# Altium PCB RiscPC_VRAM_16bit.PcbDoc (part 2 of 2)
Units mm, origin at the board's own origin, x right, y up, seen from the top; angles counter-clockwise.
Board outline 102.87 x 28 mm, 6 copper layers (Top_Power, Inner 1, Inner 2, Inner 3, Inner 4, Bottom_Ground), stack 1.211 mm thick; 29 components, 122 nets, 442 pads, 442 vias.
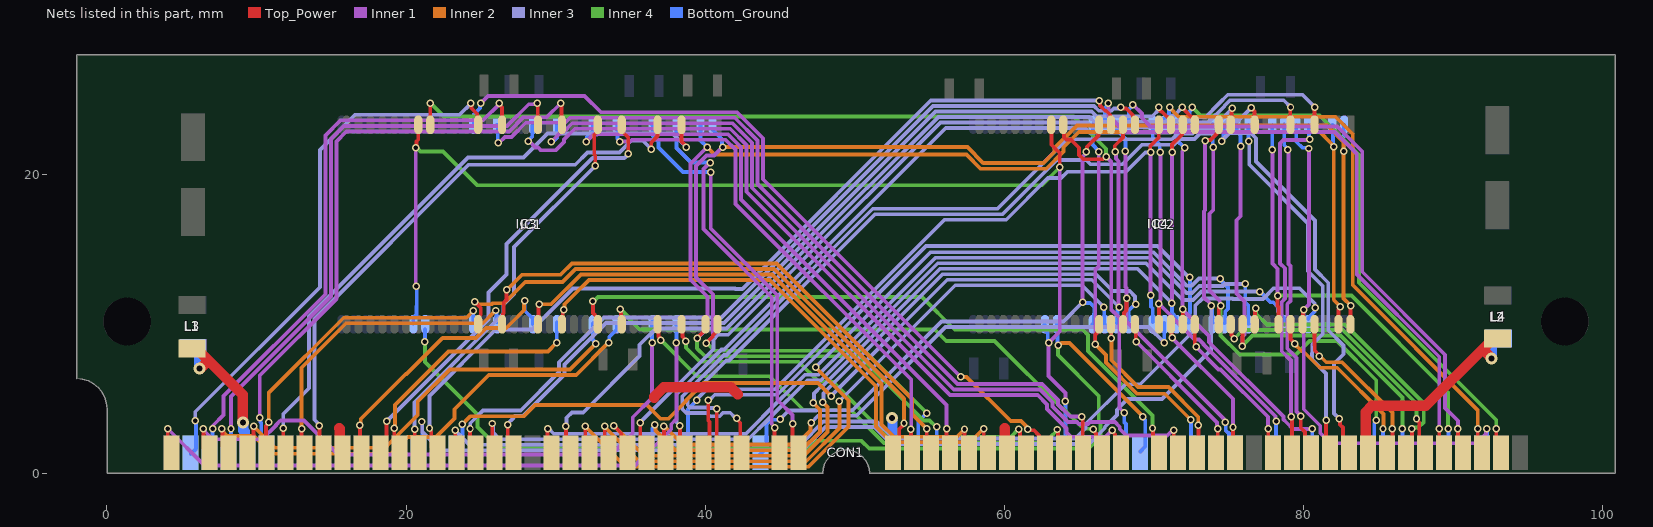
[diagram p6: the nets of this part, all layers, seen from the top]

## Via types
v1: diameter 0.5, hole 0.3, Top_Power to Bottom_Ground, tented both sides, 419 vias
v2: diameter 0.8, hole 0.4, Top_Power to Bottom_Ground, tented both sides, 23 vias

## Nets (pads, with @x,y where several pads share a name; then routed paths per layer and width w, separated by ;. In a path a pad name is that pad's centre, name@x,y a point inside that pad or via, vN(x,y) a via of type N, cw(c..) or ccw(c..) an arc to the next point about the centre after c; other vN are vias at no path point) (continued)
Rd19: CON1.B14 IC2.12 IC4.12 | length 77.3
  Top_Power w0.254: v1(73.423,22.242) 73.47,22.289 73.775,22.289 74.184,22.698 74.184,22.739 74.311,22.866 IC2.12@74.311,23.473
  Inner 1 w0.254: v1(73.423,22.242) 73.423,17.603 73.343,17.522 73.343,11.776 73.838,11.28 v1(73.838,11.218)
  Inner 3 w0.254: v1(21.055,3.477) 21.074,3.457 21.074,2.812 22.337,1.549 46.482,1.549 48.044,3.111 51.308,3.111 52.451,1.968 65.651,1.968 66.708,3.025 66.708,3.1 67.53,3.922 67.53,4.268 68.24,4.978 70.535,4.978 73.838,8.281 v1(73.838,11.218)
  Bottom_Ground w0.254: CON1.B14@20.819,1.406 21.074,1.661 21.074,3.457 v1(21.055,3.477) ; v1(73.838,11.218) 73.876,11.18 73.876,10.121 IC4.12@73.914,10.084
Rd20: CON1.B26 IC2.15 IC4.15 | length 59.4
  Top_Power w0.254: v1(71.216,21.492) 71.216,21.991 71.876,22.65 71.876,23.349 IC2.15@71.923,23.397
  Inner 1 w0.254: v1(71.202,11.379) 71.209,11.386 71.209,21.485 v1(71.216,21.492)
  Inner 2 w0.254: v1(36.63,3.254) 36.678,3.207 36.678,2.866 37.982,1.562 46.444,1.562 47.667,2.785 47.667,4.267 v1@47.219,4.715
  Inner 3 w0.254: v1(47.219,4.716) 47.265,4.763 47.265,5.347 47.789,5.872 47.883,5.872 55.702,13.691 68.891,13.691 v1(71.202,11.379)
  Bottom_Ground w0.254: CON1.B26@36.06,1.395 36.473,1.808 36.473,3.03 36.63,3.188 v1(36.63,3.254) ; v1(71.202,11.379) 71.202,10.725 71.476,10.452 IC4.15@71.476,10.109
Rd21: CON1.B28 IC2.17 IC4.17 | length 54.7
  Top_Power w0.254: v1(69.774,21.488) 69.748,21.514 69.748,21.898 70.323,22.473 IC2.17@70.323,23.346
  Inner 1 w0.254: v1(69.774,11.913) v1(69.774,21.488)
  Inner 3 w0.254: v1(39.441,4.905) 39.441,4.971 40.108,5.639 44.666,5.639 55.994,16.967 60.122,16.967 62.903,19.748 63.792,19.748 64.222,20.178 68.137,20.178 69.419,21.459 69.745,21.459 v1(69.774,21.488)
  Bottom_Ground w0.254: CON1.B28@38.573,1.355 38.838,1.62 38.838,4.187 38.84,4.189 38.84,4.294 39.441,4.895 v1(39.441,4.905) ; v1(69.774,11.913) 69.804,11.882 69.804,11.155 69.915,11.044 IC4.17@69.915,10.123
Rd22: CON1.B16 IC2.20 IC4.20 | length 66
  Top_Power w0.254: v1(67.408,21.505) 67.382,21.532 67.382,21.916 67.932,22.466 IC2.20@67.932,23.317
  Inner 1 w0.254: v1(67.408,21.505) 67.455,21.458 67.455,21.057 67.635,20.877 67.635,11.164 v1(67.682,11.117)
  Inner 2 w0.254: v1(23.743,3.309) 23.809,3.309 23.992,3.491 ; 23.982,3.501 24.317,3.835 27.889,3.835 28.626,4.572 36.096,4.572 37.011,3.658 37.55,3.658 38.718,4.826 38.718,4.877 39.887,6.045 47.549,6.045 v1(48.412,5.182)
  Inner 3 w0.254: v1(48.412,5.182) 56.185,12.954 65.846,12.954 v1(67.682,11.117)
  Bottom_Ground w0.254: CON1.B16@23.384,1.406 23.773,1.795 23.773,2.698 23.773,3.278 v1(23.743,3.309) ; IC4.20@67.513,10.058 67.572,10.117 67.572,10.94 67.682,11.051 v1(67.682,11.117)
Rd23: CON1.B32 IC2.22 IC4.22 | length 41.3
  Top_Power w0.254: v1(65.483,21.505) 65.53,21.552 65.53,21.842 66.284,22.596 66.284,23.396 IC2.22@66.335,23.447
  Inner 1 w0.254: v1(65.227,11.455) 65.227,21.183 65.483,21.439 v1(65.483,21.505)
  Inner 3 w0.254: v1(45.009,3.632) 45.584,4.208 47.422,4.208 47.444,4.229 49.847,4.229 55.791,10.173 63.944,10.173 v1(65.227,11.455)
  Bottom_Ground w0.254: CON1.B32@43.704,1.304 44.093,1.693 44.093,3.305 44.378,3.59 44.967,3.59 v1(45.009,3.632) ; v1(65.227,11.455) 65.273,11.409 65.742,11.409 66.03,11.121 66.03,10.714 65.972,10.656 65.972,10.066 IC4.22@65.888,9.982
Rd24: CON1.B51 IC2.43 IC4.43 | length 27.5
  Top_Power w0.254: v1(66.083,8.628) 66.083,9.297 66.332,9.547 IC2.43@66.332,9.977
  Inner 1 w0.254: v1(66.083,8.628) 66.083,13.631 66.303,13.851 v1(66.303,21.505)
  Inner 2 w0.254: v1(66.083,8.628) 66.787,7.923 66.787,7.419 68.872,5.334 70.726,5.334 v1(72.465,3.595)
  Bottom_Ground w0.254: IC4.43@65.915,23.333 65.915,21.96 66.303,21.572 v1(66.303,21.505) ; v1(72.465,3.595) 72.479,3.581 72.479,1.841 CON1.B51@72.889,1.431
Rd25: CON1.B53 IC2.45 IC4.45 | length 27.2
  Top_Power w0.254: IC2.45@67.896,9.998 67.989,10.091 67.989,10.729 68.174,10.914 v1(68.174,11.709)
  Inner 1 w0.254: v1(68.067,21.543) 68.104,21.505 68.104,12.467 68.174,12.398 v1(68.174,11.709) 68.174,10.153 74.651,3.675 74.651,3.629 74.774,3.506 v1(74.774,3.44)
  Bottom_Ground w0.254: IC4.45@67.513,23.335 67.513,22.974 68.104,22.383 68.104,21.581 v1(68.067,21.543) ; v1(74.774,3.44) 74.794,3.42 74.794,2.895 75.019,2.671 75.019,1.714 CON1.B53@75.429,1.304
Rd26: CON1.B55 IC2.48 IC4.48 | length 27.1
  Top_Power w0.254: IC2.48@70.332,9.977 v1(70.333,11.354)
  Inner 1 w0.254: v1(70.434,21.488) 70.434,11.626 70.38,11.571 70.38,11.401 v1(70.333,11.354) 72.72,8.966 73.016,8.966 73.317,8.665 73.317,8.627 78.12,3.824 78.12,3.542 v1(78.167,3.495)
  Bottom_Ground w0.254: IC4.48@69.921,23.278 69.921,22.481 70.387,22.014 70.387,21.535 v1(70.434,21.488) ; CON1.B55@77.918,1.33 78.167,1.578 v1(78.167,3.495)
Rd27: CON1.B57 IC2.50 IC4.50 | length 27.7
  Top_Power w0.254: v1(71.914,10.976) 71.923,10.967 71.923,9.991 IC2.50@71.935,9.98
  Inner 1 w0.254: v1(72.06,21.768) 72.06,21.701 71.894,21.536 71.894,12.904 71.914,12.885 v1(71.914,10.976) 73.685,9.204 73.685,8.779 78.658,3.807 78.658,3.613 78.876,3.395 78.878,3.395 79.291,2.982 80.572,2.982 v1(80.58,2.99)
  Bottom_Ground w0.254: IC4.50@71.515,23.321 71.515,22.307 72.054,21.768 v1(72.06,21.768) ; CON1.B57@80.458,1.38 80.58,1.502 v1(80.58,2.99)
Rd28: CON1.B60 IC2.53 IC4.53 | length 33.3
  Top_Power w0.254: IC2.53@74.332,9.977 74.332,11.032 74.452,11.152 v1(74.452,11.218)
  Inner 1 w0.254: v1(73.961,21.827) 73.961,17.62 73.711,17.37 73.711,12.229 74.405,11.535 74.405,11.265 v1(74.452,11.218)
  Inner 4 w0.254: v1(74.452,11.218) 74.452,9.236 75.734,7.954 79.506,7.954 80.404,8.852 82.246,8.852 84.861,6.236 v1(84.861,3.556)
  Bottom_Ground w0.254: IC4.53@73.914,23.335 73.938,23.311 73.938,21.85 v1(73.961,21.827) ; CON1.B60@84.319,1.406 84.725,1.812 84.725,3.353 84.861,3.489 v1(84.861,3.556)
Rd29: CON1.B62 IC2.55 IC4.55 | length 33.3
  Top_Power w0.254: v1(75.895,8.517) 75.914,8.536 75.914,9.959 IC2.55@75.932,9.977
  Inner 1 w0.254: v1(75.793,21.879) 75.793,21.171 75.793,17.203 75.527,16.937 75.527,12.027 76.048,11.506 76.048,9.275 75.921,9.148 75.921,8.543 v1(75.895,8.517)
  Inner 4 w0.254: v1(75.895,8.517) 76.598,9.22 82.473,9.22 86.614,5.08 v1@86.614,2.997
  Bottom_Ground w0.254: IC4.55@75.514,23.335 75.514,22.893 75.793,22.614 v1(75.793,21.879) ; v1@86.614,2.997 86.614,1.727 CON1.B62@86.884,1.457
  other v1: 86.614,3
Rd30: CON1.B64 IC2.58 IC4.58 | length 31.7
  Top_Power w0.254: v1(78.266,11.895) 78.266,11.203 78.332,11.137 IC2.58@78.332,9.977
  Inner 1 w0.254: v1(77.91,21.632) 77.919,21.624 77.919,14.04 78.266,13.693 v1(78.266,11.895)
  Inner 4 w0.254: v1(78.266,11.895) 83.203,11.895 89.664,5.434 89.664,3.025 v1@89.692,2.997
  Bottom_Ground w0.254: v1(77.91,21.632) 77.913,21.635 77.913,23.319 IC4.58@77.915,23.322 ; CON1.B64@89.399,1.431 89.692,1.724 v1@89.692,2.997
  other v1: 89.692,3
Rd31: CON1.B66 IC2.60 IC4.60 | length 36.5
  Top_Power w0.254: IC2.60@79.932,9.977 79.974,10.019 79.974,10.907 v1(80.015,10.948)
  Inner 1 w0.254: v1(80.365,21.73) 80.365,11.298 v1(80.015,10.948) 80.015,4.302 81.119,3.198 81.119,2.701 81.794,2.026 91.586,2.026 92.21,2.65 92.21,2.956 v1(92.257,3.003)
  Bottom_Ground w0.254: IC4.60@79.515,23.322 79.515,22.187 79.925,21.777 80.318,21.777 v1(80.365,21.73) ; CON1.B66@91.939,1.406 92.257,1.724 v1(92.257,3.003)
Sc: CON1.B36 IC1.64 IC2.64 IC3.64 IC4.64 | length 95.3
  Top_Power w0.254: v1(40.056,8.712) 40.502,9.158 40.502,9.231 40.818,9.547 IC1.64@40.818,9.977 ; IC2.64@83.132,9.977 83.146,9.991 83.146,11.188 v1(83.16,11.201)
  Inner 1 w0.254: v1(40.056,8.712) 40.513,9.169 40.513,11.989 39.387,13.115 39.387,20.556 40.09,21.26 40.598,21.26 v1(41.16,21.823)
  Inner 4 w0.254: v1(40.056,8.712) 40.122,8.712 40.63,8.204 50.648,8.204 v1(54.813,4.039)
  Inner 2 w0.254: v1(41.16,21.823) 57.527,21.823 58.581,20.768 62.611,20.768 63.339,21.496 63.339,21.759 64.846,23.266 81.585,23.266 82.677,22.174 v1(82.677,21.539) 82.677,11.705 83.16,11.223 v1(83.16,11.201)
  Bottom_Ground w0.254: IC3.64@40.481,22.979 41.113,22.346 41.113,21.87 v1(41.16,21.823) ; CON1.B36@53.839,1.431 54.245,1.837 54.245,3.47 v1(54.813,4.039) ; v1(82.677,21.539) 82.696,21.558 82.696,23.303 IC4.64@82.715,23.322
Se*: CON1.B37 IC1.63 IC2.63 IC3.63 IC4.63 | length 95.3
  Top_Power w0.254: v1(39.459,9.035) 39.459,9.052 40.018,9.61 IC1.63@40.018,9.977 ; IC2.63@82.332,9.977 82.348,9.993 82.348,10.983 82.444,11.08 v1(82.444,11.146)
  Inner 1 w0.254: v1(39.459,9.035) 40.145,9.721 40.145,11.824 39.018,12.95 39.018,20.709 v1(40.132,21.823)
  Inner 4 w0.254: v1(39.459,9.035) 39.459,8.369 39.992,7.836 50.321,7.836 54.61,3.547 55.004,3.547 55.427,3.124 v1(55.474,3.124)
  Inner 2 w0.254: v1(40.132,21.823) 40.623,21.331 57.459,21.331 58.41,20.381 62.799,20.381 63.957,21.539 63.957,21.819 64.973,22.835 81.093,22.835 81.825,22.102 81.825,22.093 82.017,21.902 82.017,11.611 82.444,11.184 v1(82.444,11.146)
  Bottom_Ground w0.254: IC3.63@39.681,23.329 39.681,22.273 v1(40.132,21.823) ; CON1.B37@55.033,1.431 55.474,1.872 v1(55.474,3.124) ; IC4.63@81.915,23.322 81.97,23.268 81.97,21.882 v1(82.017,21.835)
Ud0: CON1.A1 IC3.4 | length 44.6
  Top_Power w0.254: v1@4.068,2.997 4.068,1.683 CON1.A1@4.409,1.342
  Inner 1 w0.254: v1@4.068,2.997 6.532,0.533 35.306,0.533 37.73,2.957 37.73,3.296 38.075,3.641 v1(38.075,8.75)
  Bottom_Ground w0.254: v1@38.075,8.839 IC3.4@38.075,10.008
  other v1: 4.068,3
Ud1: CON1.A3 IC3.6 | length 40.8
  Top_Power w0.254: v1@6.451,2.997 6.451,1.662 CON1.A3@6.847,1.266
  Inner 1 w0.254: v1@6.451,2.997 6.451,2.931 6.574,2.808 6.574,2.794 7.082,2.286 10.363,2.286 11.293,3.216 11.293,3.235 11.581,3.523 11.6,3.523 11.616,3.539 13.168,3.539 15.437,1.27 33.731,1.27 35.157,2.695 35.157,3.762 36.449,5.055 v1(36.449,8.75)
  Bottom_Ground w0.254: v1@36.449,8.966 IC3.6@36.449,10.135
  other v1: 6.451,3
Ud2: CON1.A4 IC3.9 | length 33.4
  Top_Power w0.254: v1@7.68,2.997 7.717,2.96 7.717,1.793 CON1.A4@8.168,1.342
  Inner 2 w0.254: v1@7.68,2.997 7.68,2.933 7.803,2.81 7.803,2.755 8.043,2.515 9.83,2.515 11.024,1.321 18.999,1.321 20.117,2.438 21.996,2.438 23.241,3.683 23.241,4.293 25.532,6.583 31.374,6.583 v1(33.539,8.749)
  Bottom_Ground w0.254: v1(33.539,8.749) 33.586,8.796 33.586,9.127 34.087,9.627 IC3.9@34.087,10.033
  other v1: 7.68,3
Ud3: CON1.A5 IC3.11 | length 30.8
  Top_Power w0.254: CON1.A5@9.412,1.342 8.987,1.768 9.16,1.768 9.803,2.411 9.803,3.148 v1(9.83,3.175)
  Inner 2 w0.254: v1(9.83,3.175) 9.83,3.124 11.227,1.727 18.593,1.727 20.782,3.917 20.782,4.806 22.937,6.96 30.96,6.96 v1(32.669,8.669)
  Bottom_Ground w0.254: IC3.11@32.487,10.033 32.487,8.918 32.669,8.736 v1(32.669,8.669)
Ud4: CON1.A13 IC3.14 | length 17.1
  Top_Power w0.254: v1(19.212,3.041) 19.212,1.753 CON1.A13@19.572,1.393
  Inner 2 w0.254: v1(19.212,3.041) 19.255,3.084 19.255,4.574 22.843,8.162 29.486,8.162 v1(30.074,8.75)
  Bottom_Ground w0.254: v1@30.074,8.941 IC3.14@30.074,10.109
Ud5: CON1.A11 IC3.16 | length 18.8
  Top_Power w0.254: v1(16.916,3.226) 16.916,1.484 CON1.A11@17.058,1.342
  Inner 2 w0.254: v1(16.916,3.226) 16.963,3.273 16.963,3.637 19.982,6.656 20.034,6.656 22.446,9.068 24.676,9.068 25.333,9.724 26.691,9.724 27.886,10.919 27.886,11.496 v1(27.933,11.543)
  Bottom_Ground w0.254: v1(27.933,11.543) 27.933,10.887 28.407,10.412 28.487,10.412 IC3.16@28.487,9.982
Ud6: CON1.A8 IC3.19 | length 21.2
  Top_Power w0.254: v1(13.012,3.001) 13.012,1.527 CON1.A8@13.222,1.317
  Inner 2 w0.254: v1(13.012,3.001) 13.012,7.068 15.986,10.042 25.13,10.042 25.986,10.899 v1(26.01,10.899)
  Bottom_Ground w0.254: v1(26.01,10.899) 26.048,10.86 26.048,10.172 IC3.19@26.086,10.135
Ud7: CON1.A6 IC3.21 | length 20.8
  Top_Power w0.254: CON1.A6@10.624,1.405 10.624,3.186 10.809,3.37 v1(10.809,3.437)
  Inner 2 w0.254: v1(10.809,3.437) 10.812,3.439 10.812,5.389 15.837,10.414 24.03,10.414 v1(24.495,10.879)
  Bottom_Ground w0.254: IC3.21@24.486,10.084 24.491,10.089 24.491,10.875 v1(24.495,10.879)
Ud8: CON1.A43 IC3.44 | length 51.6
  Top_Power w0.254: v1(61.566,2.944) 61.613,2.897 61.974,2.897 62.319,2.552 62.319,1.75 CON1.A43@62.702,1.368
  Inner 1 w0.254: v1@24.998,24.769 25.476,25.247 31.934,25.247 33.025,24.155 41.834,24.155 42.127,24.155 43.862,22.42 43.862,22.127 43.862,19.672 v1@57.082,6.452
  Inner 2 w0.254: v1(57.099,6.469) 57.11,6.459 57.473,6.459 60.427,3.505 61.114,3.505 61.444,3.175 61.444,3.133 61.566,3.01 v1(61.566,2.944)
  Bottom_Ground w0.254: IC3.44@24.487,23.322 24.544,23.379 24.544,24.011 24.951,24.418 24.951,24.722 v1@24.998,24.769
  other v1: 24.998,24.75
Ud9: CON1.A45 IC3.46 | length 53.5
  Top_Power w0.254: v1(65.176,3.81) 65.223,3.763 65.223,3.659 65.236,3.647 65.236,1.424 CON1.A45@65.242,1.418
  Inner 1 w0.254: v1(26.163,22.123) 26.23,22.123 26.609,22.502 27.049,22.502 28.004,23.457 30.632,23.457 30.962,23.787 41.643,23.787 41.974,23.787 43.493,22.268 43.493,21.937 43.493,19.346 56.862,5.978 62.535,5.978 63.593,4.92 63.593,4.622 64.405,3.81 v1(65.176,3.81)
  Bottom_Ground w0.254: IC3.46@26.087,23.322 26.125,23.284 26.125,22.161 v1(26.163,22.123)
Ud10: CON1.A47 IC3.49 | length 53.8
  Top_Power w0.254: v1(67.199,2.896) 67.199,2.829 67.399,2.629 67.399,1.801 CON1.A47@67.807,1.393
  Inner 1 w0.254: v1(28.179,22.214) 28.242,22.214 28.657,21.8 28.836,21.8 29.03,21.607 29.998,21.607 30.549,22.158 30.549,22.326 31.274,23.05 41.669,23.05 42.757,21.963 42.757,18.838 56.354,5.241 62.23,5.241 62.856,4.615 62.856,4.317 64.16,3.013 64.16,2.743 64.449,2.454 66.757,2.454 v1(67.199,2.896)
  Bottom_Ground w0.254: v1(28.179,22.214) 28.179,22.281 28.431,22.533 28.431,23.266 IC3.49@28.487,23.322
Ud11: CON1.A50 IC3.51 | length 56.1
  Top_Power w0.254: v1(71.327,2.906) 71.327,1.658 CON1.A50@71.642,1.342
  Inner 1 w0.254: v1(29.71,22.182) 30.352,22.824 30.52,22.824 31.115,23.419 41.466,23.419 41.822,23.419 43.125,22.115 43.125,21.759 43.125,19.105 56.621,5.609 62.383,5.609 63.225,4.768 63.225,4.47 64.256,3.438 64.855,3.438 64.975,3.319 65.612,3.319 65.73,3.437 67.395,3.437 67.711,3.121 67.711,2.973 68.145,2.539 70.894,2.539 71.26,2.906 v1(71.327,2.906)
  Bottom_Ground w0.254: v1(29.71,22.182) 29.758,22.229 29.872,22.229 30.087,22.444 IC3.51@30.087,23.322
Ud12: CON1.A38 IC3.54 | length 38.5
  Top_Power w0.254: v1@56.134,2.972 56.134,1.636 CON1.A38@56.453,1.317
  Inner 1 w0.254: v1(32.053,22.188) 32.538,22.673 32.781,22.673 32.79,22.682 41.516,22.682 42.389,21.81 42.389,18.317 56.134,4.572 v1(56.134,3)
  Bottom_Ground w0.254: v1(32.053,22.188) 32.1,22.235 32.1,22.505 32.487,22.892 IC3.54@32.487,23.322
Ud13: CON1.A36 IC3.56 | length 34.5
  Top_Power w0.254: v1(53.75,2.946) 53.75,1.429 CON1.A36@53.837,1.342
  Inner 1 w0.254: v1(34.296,22.188) 34.968,22.188 35.094,22.314 41.364,22.314 42.02,21.658 42.02,18.025 53.78,6.265 53.78,2.977 v1(53.75,2.946)
  Bottom_Ground w0.254: IC3.56@34.087,23.322 34.144,23.266 34.144,22.406 34.296,22.255 v1(34.296,22.188)
Ud14: CON1.A34 IC3.59 | length 27.1
  Top_Power w0.254: v1(45.836,3.313) 45.836,1.774 CON1.A34@46.242,1.368
  Inner 1 w0.254: v1(40.369,20.155) 40.369,16.387 44.818,11.938 44.818,4.929 45.836,3.912 v1(45.836,3.313)
  Bottom_Ground w0.254: IC3.59@36.481,23.303 36.508,23.276 36.508,22.573 36.881,22.199 36.881,21.804 38.522,20.164 40.361,20.164 v1(40.369,20.155)
Ud15: CON1.A33 IC3.61 | length 25.7
  Top_Power w0.254: v1(44.635,3.066) 44.635,1.629 CON1.A33@44.972,1.291
  Inner 1 w0.254: v1(40.331,20.769) 40.288,20.769 39.878,20.359 39.878,16.358 44.45,11.786 44.45,3.317 44.635,3.132 v1(44.635,3.066)
  Bottom_Ground w0.254: IC3.61@38.075,22.985 38.075,21.768 39.04,20.803 40.297,20.803 v1(40.331,20.769)
Ud16: CON1.A16 IC4.4 | length 67.6
  Top_Power w0.254: v1(23.282,2.902) 23.282,1.493 CON1.A16@23.459,1.317
  Inner 3 w0.254: v1(23.282,2.902) 23.282,2.876 24.24,1.918 46.329,1.918 47.892,3.48 51.46,3.48 52.603,2.337 64.736,2.337 65.442,3.043 65.442,3.323 68.088,5.969 69.088,5.969 72.762,9.643 72.762,11.227 73.245,11.709 75.251,11.709 75.286,11.675 77.293,11.675 77.66,12.043 77.66,12.052 77.994,12.386 79.732,12.386 80.752,11.367 80.752,11.114 v1(80.799,11.067)
  Bottom_Ground w0.254: IC4.4@80.315,10.332 80.315,10.386 80.752,10.823 80.752,11.02 v1(80.799,11.067)
Ud17: CON1.A18 IC4.6 | length 63.2
  Top_Power w0.254: v1(25.756,3.344) 25.756,1.611 CON1.A18@25.999,1.368
  Inner 3 w0.254: v1(25.756,3.344) 25.803,3.297 25.803,2.75 26.266,2.286 42.881,2.286 44.24,3.646 44.24,3.651 46.829,6.24 47.731,6.24 55.55,14.059 69.478,14.059 71.929,11.608 72.622,11.608 73.185,12.171 77.085,12.171 v1(77.089,12.167)
  Bottom_Ground w0.254: v1(77.089,12.167) 77.8,11.455 77.978,11.455 78.299,11.134 78.299,10.828 78.715,10.412 IC4.6@78.715,10.033
Ud18: CON1.A21 IC4.9 | length 57.4
  Top_Power w0.254: v1@29.464,2.921 29.464,1.585 CON1.A21@29.783,1.266
  Inner 3 w0.254: v1(29.464,3) 29.531,3 29.876,2.654 42.728,2.654 43.872,3.798 43.872,3.803 46.677,6.608 47.578,6.608 55.397,14.427 69.812,14.427 72.174,12.065 72.558,12.065 73.032,12.539 74.626,12.539 74.761,12.675 v1(76.098,12.675)
  Bottom_Ground w0.254: v1(76.098,12.675) 76.098,11.967 76.098,11.45 76.301,11.248 76.301,10.034 IC4.9@76.327,10.008
Ud19: CON1.A23 IC4.11 | length 61.3
  Top_Power w0.254: v1(31.979,3.146) 31.979,1.611 CON1.A23@32.298,1.291
  Inner 2 w0.254: v1(31.979,3.146) 34.667,0.457 46.902,0.457 49.574,3.13 49.574,4.899 v1(47.375,7.099)
  Inner 3 w0.254: v1(47.375,7.099) 55.071,14.795 69.964,14.795 72.212,12.548 72.52,12.548 73.003,13.03 v1(74.422,13.03)
  Bottom_Ground w0.254: v1(74.422,13.03) 74.422,12.964 74.943,12.442 74.943,11.015 74.772,10.843 74.772,10.101 IC4.11@74.715,10.045
Ud20: CON1.A29 IC4.14 | length 44.1
  Top_Power w0.254: CON1.A29@39.875,1.393 40.283,1.801 40.283,3.453 40.208,3.528 v1(40.208,4.905)
  Inner 3 w0.254: v1(40.208,4.905) 40.275,4.905 40.641,5.271 44.818,5.271 54.763,15.215 70.24,15.215 72.347,13.108 v1(72.386,13.108)
  Bottom_Ground w0.254: IC4.14@72.314,10.084 72.372,10.142 72.372,10.739 72.405,10.773 72.405,13.088 v1(72.386,13.108)
Ud21: CON1.A27 IC4.16 | length 41
  Top_Power w0.254: v1(37.238,3.166) 37.238,1.431 CON1.A27@37.321,1.348
  Inner 2 w0.254: v1(37.238,3.166) 37.261,3.166 38.497,1.93 46.101,1.93 47.04,2.869 47.04,3.352 v1(47.087,3.399)
  Inner 3 w0.254: v1(47.087,3.399) 47.549,3.861 50.114,3.861 56.058,9.804 69.634,9.804 v1(70.688,8.75)
  Bottom_Ground w0.254: v1@70.688,8.915 IC4.16@70.688,10.084
Ud22: CON1.A25 IC4.19 | length 47.4
  Top_Power w0.254: v1(33.898,3.186) 34.387,2.697 34.387,1.742 CON1.A25@34.812,1.317
  Inner 2 w0.254: v1(33.898,3.186) 35.89,1.194 46.596,1.194 48.184,2.781 48.184,4.445 v1(47.854,4.775)
  Inner 3 w0.254: v1(47.854,4.775) 47.901,4.822 47.901,5.365 55.858,13.322 66.129,13.322 67.251,12.201 68.377,12.201 68.736,11.842 68.736,11.35 v1(68.783,11.303)
  Bottom_Ground w0.254: IC4.19@68.315,10.174 68.315,10.899 68.719,11.303 v1(68.783,11.303)
Ud23: CON1.A24 IC4.21 | length 44
  Top_Power w0.254: v1(33.285,3.146) 33.285,1.574 CON1.A24@33.517,1.342
  Inner 2 w0.254: v1(33.285,3.146) 33.285,3.104 35.564,0.826 46.749,0.826 48.971,3.047 48.971,4.808 v1(48.96,4.819)
  Inner 3 w0.254: v1(48.96,4.819) 48.96,4.828 56.718,12.586 65.19,12.586 v1(66.649,11.127)
  Bottom_Ground w0.254: v1(66.649,11.127) 66.682,11.094 66.682,10.015 IC4.21@66.715,9.982
Ud24: CON1.A64 IC4.44 | length 42.4
  Top_Power w0.254: v1(89.078,3) 89.078,1.687 CON1.A64@89.397,1.368
  Inner 1 w0.254: v1(66.952,24.748) 66.952,23.929 68.057,22.824 77.54,22.824 77.55,22.834 82.106,22.834 83.553,21.387 83.553,13.335 89.078,7.81 v1(89.078,3)
  Bottom_Ground w0.254: IC4.44@66.723,23.332 66.723,24.453 66.952,24.682 v1(66.952,24.748)
Ud25: CON1.A65 IC4.46 | length 41.1
  Top_Power w0.254: v1(90.322,3) 90.322,1.712 CON1.A65@90.642,1.393
  Inner 1 w0.254: v1(68.598,24.654) 69.192,24.061 69.192,23.781 69.781,23.192 77.387,23.192 77.397,23.202 82.259,23.202 83.922,21.539 83.922,13.487 89.469,7.94 89.469,4.384 90.322,3.531 v1(90.322,3)
  Bottom_Ground w0.254: IC4.46@68.315,23.346 68.315,24.328 68.598,24.611 v1(68.598,24.654)
Ud26: CON1.A66 IC4.49 | length 39.1
  Top_Power w0.254: v1(91.643,3.003) 91.643,1.687 CON1.A66@91.937,1.393
  Inner 2 w0.254: v1@71.044,24.46 71.651,23.853 82.129,23.853 83.287,22.695 83.287,12.598 91.643,4.242 v1(91.643,3.003)
  Bottom_Ground w0.254: IC4.49@70.714,23.334 70.714,23.752 70.997,24.034 70.997,24.413 v1@71.044,24.46
  other v1: 71.044,24.5
Ud27: CON1.A67 IC4.51 | length 37.6
  Top_Power w0.254: v1(92.888,3.003) 92.888,1.712 CON1.A67@93.207,1.393
  Inner 4 w0.254: v1@72.568,24.469 73.108,23.929 77.082,23.929 77.092,23.939 81.09,23.939 83.718,21.311 83.718,12.751 92.888,3.581 v1(92.888,3.003)
  Bottom_Ground w0.254: IC4.51@72.271,23.278 72.372,23.378 72.372,24.205 72.568,24.402 v1@72.568,24.469
  other v1: 72.568,24.5
Ud28: CON1.A59 IC4.54 | length 28
  Top_Power w0.254: v1(82.398,3.658) 82.445,3.611 82.445,3.265 82.639,3.071 82.639,1.928 CON1.A59@83.149,1.418
  Inner 3 w0.254: v1(74.546,22.225) 74.546,22.257 75.048,22.758 76.479,22.758 76.818,22.42 76.818,20.87 80.772,16.916 80.772,13.64 81.658,12.754 81.658,9.579 82.677,8.56 82.677,7.976 82.042,7.341 82.042,4.013 v1(82.398,3.658)
  Bottom_Ground w0.254: v1(74.546,22.225) 74.546,22.292 74.658,22.404 74.658,23.278 IC4.54@74.708,23.328
Ud29: CON1.A58 IC4.56 | length 24.8
  Top_Power w0.254: v1(81.509,3.556) 81.509,1.661 CON1.A58@81.777,1.393
  Inner 3 w0.254: v1(76.327,22.2) 76.367,22.16 76.367,20.661 80.307,16.721 80.307,13.52 81.29,12.538 81.29,9.332 80.586,8.628 80.586,8.065 80.564,8.044 80.564,7.636 81.509,6.692 v1(81.509,3.556)
  Bottom_Ground w0.254: IC4.56@76.315,23.322 76.321,23.315 76.321,22.206 v1(76.327,22.2)
Ud30: CON1.A57 IC4.59 | length 22.9
  Top_Power w0.254: v1(79.81,3.813) 79.82,3.803 79.82,3.055 80.099,2.776 80.099,1.826 CON1.A57@80.532,1.393
  Inner 1 w0.254: v1(78.96,21.641) 78.994,21.607 78.994,14.007 79.126,13.876 79.126,11.539 78.91,11.323 78.91,8.368 79.534,7.744 79.534,4.155 79.81,3.879 v1(79.81,3.813)
  Bottom_Ground w0.254: IC4.59@78.715,23.334 78.715,21.952 78.96,21.707 v1(78.96,21.641)
Ud31: CON1.A56 IC4.61 | length 24.2
  Top_Power w0.254: v1(79.166,3.8) 79.166,3.734 79.223,3.677 CON1.A56@79.223,1.445
  Inner 1 w0.254: v1(79.166,3.8) 79.166,7.55 78.541,8.174 78.541,11.475 78.757,11.691 78.757,13.723 78.43,14.05 78.43,22.082 78.643,22.296 80.358,22.296 v1(80.405,22.343)
  Bottom_Ground w0.254: IC4.61@80.315,23.309 80.36,23.264 80.36,22.388 v1(80.405,22.343)
VCC: CON1.A10 CON1.A41 CON1.A60 CON1.B5 CON1.B35 L1.1 L2.1 L3.1 L4.1 | length 39.2
  Top_Power w0.7: L1.1@5.69,8.354 5.99,8.354 6.893,7.451 ; v2(6.198,7.01) 6.225,7.01 6.666,7.451 6.893,7.451 ; v2(9.088,3.416) 9.088,5.256 6.893,7.451 ; 15.545,3.023 15.56,3.007 15.56,1.578 CON1.A10@15.745,1.393 ; 36.601,5.055 36.601,5.145 37.222,5.766 41.699,5.766 42.164,5.301 42.164,5.283 ; 60.02,3.023 60.02,1.56 CON1.A41@60.187,1.393 ; CON1.A60@84.317,1.393 84.147,1.563 84.147,4.108 84.56,4.521 88.185,4.521 91.972,8.308 ; v2(92.583,7.696) 91.972,8.308 ; L2.1@92.976,9.012 92.676,9.012 91.972,8.308
  Bottom_Ground w0.7: L3.1@5.74,8.38 5.928,8.38 6.178,8.13 6.178,7.03 v2(6.198,7.01) ; v2(9.088,3.416) 9.107,3.397 9.107,3.326 9.115,3.318 9.115,2.879 9.21,2.785 9.21,1.578 CON1.B5@9.395,1.393 ; v2(52.502,3.708) 52.521,3.689 52.521,1.439 CON1.B35@52.567,1.393 ; v2(92.583,7.696) 92.602,7.715 92.602,8.765 92.852,9.015 L4.1@93.04,9.015
Vcd0: CON1.A7 IC1.4 | length 42.3
  Top_Power w0.254: v1(11.784,3.032) 11.784,1.459 CON1.A7@11.978,1.266 ; IC1.4@38.418,23.317 38.418,22.204 38.733,21.889 v1(38.733,21.823)
  Inner 3 w0.254: v1(11.784,3.032) v1(11.784,3.032) 11.786,3.988 13.5,5.702 13.5,10.493 24.145,21.137 27.849,21.137 29.445,22.733 37.822,22.733 v1(38.733,21.823)
Vcd1: CON1.A9 IC1.6 | length 38.8
  Top_Power w0.254: v1(14.209,3.193) 14.209,1.6 CON1.A9@14.492,1.317 ; v1(36.39,21.692) 36.39,22.141 36.807,22.558 36.807,23.383 IC1.6@36.818,23.394
  Inner 3 w0.254: v1(14.209,3.193) 14.209,3.253 13.868,3.594 13.868,10.34 24.17,20.642 31.315,20.642 32.137,21.463 34.265,21.463 35.046,22.244 35.837,22.244 v1(36.39,21.692)
Vcd2: CON1.A12 IC1.9 | length 30.3
  Top_Power w0.254: CON1.A12@18.282,1.401 18.693,1.812 18.693,3.478 v1(18.694,3.48) ; IC1.9@34.418,23.412 34.418,22.887 34.849,22.456 34.849,21.387 v1(34.866,21.369)
  Inner 3 w0.254: v1(18.694,3.48) 25.518,10.304 25.518,12.107 26.721,13.31 26.721,15.342 32.474,21.095 34.592,21.095 v1(34.866,21.369)
Vcd3: CON1.A14 IC1.11 | length 27.3
  Top_Power w0.254: v1(20.583,2.966) 20.583,1.602 CON1.A14@20.893,1.291 ; v1(32.644,20.569) 32.644,21.261 32.577,21.328 32.577,22.647 32.761,22.83 IC1.11@32.761,23.35
  Inner 3 w0.254: v1(20.583,2.966) 20.559,2.99 20.559,4.753 26.501,10.695 26.501,11.274 27.225,11.998 27.225,15.151 v1(32.644,20.569)
Vcd4: CON1.B6 IC1.14 | length 40.7
  Top_Power w0.254: v1@30.353,24.756 30.385,24.723 30.385,23.456 IC1.14@30.42,23.422
  Inner 1 w0.254: v1(10.211,3.718) 10.211,6.55 15.34,11.679 15.34,22.207 16.003,22.87 26.896,22.87 27.851,23.825 29.409,23.825 30.34,24.756 v1@30.353,24.756
  Bottom_Ground w0.254: v1(10.211,3.718) 10.259,3.671 10.259,3.441 10.321,3.379 10.321,1.853 CON1.B6@10.815,1.359
  other v1: 30.353,24.75
Vcd5: CON1.B4 IC1.16 | length 39.9
  Top_Power w0.254: v1@28.778,24.74 28.798,24.72 28.798,23.49 IC1.16@28.818,23.471
  Inner 1 w0.254: v1(8.294,3.006) 8.294,5.154 14.971,11.831 14.971,22.359 15.85,23.238 26.743,23.238 28.198,24.693 28.731,24.693 v1@28.778,24.74
  Bottom_Ground w0.254: CON1.B4@8.119,1.33 8.294,1.505 v1(8.294,3.006)
  other v1: 28.778,24.75
Vcd6: CON1.B3 IC1.19 | length 38.3
  Top_Power w0.254: v1@26.238,24.71 26.238,24.643 26.418,24.464 IC1.19@26.418,23.484
  Inner 1 w0.254: v1(7.065,3) 7.112,3.047 7.112,3.226 7.799,3.912 7.799,5.179 14.603,11.984 14.603,22.604 15.616,23.617 25.146,23.617 v1@26.238,24.71
  Bottom_Ground w0.254: CON1.B3@6.823,1.33 7.065,1.572 v1@7.065,2.997
  other v1: 26.238,24.75
Vcd7: CON1.B2 IC1.21 | length 36.8
  Top_Power w0.254: v1@24.329,24.74 24.376,24.693 24.376,24.417 24.762,24.031 24.762,23.453 IC1.21@24.784,23.432
  Inner 3 w0.254: v1(5.906,3.529) 5.906,4.128 14.235,12.457 14.235,21.626 16.594,23.985 23.575,23.985 v1@24.329,24.74
  Bottom_Ground w0.254: CON1.B2@5.604,1.304 5.95,1.65 5.95,3.485 v1(5.906,3.529)
  other v1: 24.329,24.75
Vcd8: CON1.A35 IC1.44 | length 39
  Top_Power w0.254: v1(24.599,11.493) 24.599,11.47 24.986,11.083 24.986,10.576 24.818,10.407 IC1.44@24.818,9.977 ; CON1.A35@52.643,1.317 52.975,1.649 52.975,2.972 53.289,3.286 v1(53.289,3.353)
  Inner 2 w0.254: v1(24.599,11.493) 24.666,11.493 24.836,11.322 25.738,11.322 25.806,11.39 26.545,11.39 27.093,11.938 27.963,12.808 30.461,12.808 31.331,13.678 44.616,13.678 53.289,5.005 v1(53.289,3.353)
Vcd9: CON1.A37 IC1.46 | length 38.2
  Top_Power w0.254: IC1.46@26.418,9.998 26.474,10.055 26.474,10.669 26.525,10.719 26.525,11.446 26.72,11.642 26.72,12.26 v1(26.733,12.273) ; v1@54.805,2.997 54.805,1.67 CON1.A37@55.132,1.342
  Inner 2 w0.254: v1(26.733,12.273) 27.745,13.284 30.328,13.284 31.09,14.046 44.769,14.046 53.835,4.979 53.835,3.969 v1(54.805,3)
Vcd10: CON1.A39 IC1.49 | length 38.7
  Top_Power w0.254: IC1.49@28.818,9.977 28.861,10.021 28.861,11.271 v1(28.905,11.315) ; v1(57.335,2.956) 57.335,1.68 CON1.A39@57.698,1.317
  Inner 2 w0.254: v1(28.905,11.315) 29.697,11.315 31.692,13.31 44.463,13.31 51.784,5.989 51.784,3.283 52.612,2.455 56.834,2.455 v1(57.335,2.956)
Vcd11: CON1.A40 IC1.51 | length 38.4
  Top_Power w0.254: IC1.51@30.418,9.977 30.474,10.034 30.474,10.828 30.543,10.897 v1(30.543,10.963) ; v1@58.623,2.997 58.623,1.661 CON1.A40@58.942,1.342
  Inner 2 w0.254: v1(30.543,10.963) 30.59,11.01 30.59,11.316 31.292,12.018 31.297,12.018 32.22,12.941 44.311,12.941 51.416,5.836 51.416,3.13 52.46,2.087 57.71,2.087 v1(58.623,3)
Vcd12: CON1.A49 IC1.54 | length 45.8
  Top_Power w0.254: v1(32.491,11.532) 32.491,10.734 32.818,10.407 IC1.54@32.818,9.977 ; v1(69.903,3.031) 69.939,2.995 69.939,1.877 CON1.A49@70.398,1.418
  Inner 4 w0.254: v1(32.491,11.532) 32.558,11.532 32.831,11.805 54.489,11.805 56.68,9.614 65.24,9.614 65.591,9.263 65.591,8.185 69.903,3.873 v1(69.903,3.031)
Vcd13: CON1.A46 IC1.56 | length 37.9
  Top_Power w0.254: v1(34.333,10.994) 34.375,10.952 34.375,10.019 IC1.56@34.418,9.977 ; v1(65.934,2.946) 65.934,2.879 66.129,2.684 66.129,1.801 CON1.A46@66.562,1.368
  Inner 4 w0.254: v1(34.333,10.994) 34.827,10.5 34.827,10.416 35.617,9.627 55.347,9.627 56.109,8.865 59.351,8.865 63.881,4.335 63.957,4.335 64.973,3.319 64.975,3.319 65.303,2.991 65.889,2.991 v1(65.934,2.946)
Vcd14: CON1.A44 IC1.59 | length 32.7
  Top_Power w0.254: IC1.59@36.818,9.977 36.874,9.921 36.874,9.152 37.039,8.988 v1(37.039,8.921) ; v1(63.536,2.943) 63.536,2.876 63.589,2.823 63.589,1.801 CON1.A44@64.022,1.368
  Inner 4 w0.254: v1(37.039,8.921) 39.463,6.497 44.312,6.497 46.584,4.225 49.75,4.225 51.943,2.032 62.747,2.032 63.061,2.346 63.061,2.418 63.536,2.893 v1(63.536,2.943)
Vcd15: CON1.A42 IC1.61 | length 28.5
  Top_Power w0.254: IC1.61@38.418,9.977 38.474,9.921 38.474,9.141 38.71,8.906 v1(38.71,8.839) ; v1(60.953,2.972) 60.953,2.905 61.049,2.809 61.049,1.699 CON1.A42@61.432,1.317
  Inner 4 w0.254: v1(38.71,8.839) 38.71,8.407 39.649,7.468 46.247,7.468 47.573,6.141 48.503,6.141 52.189,2.455 60.436,2.455 v1(60.953,2.972)
Vcd16: CON1.A26 IC2.4 | length 58.5
  Top_Power w0.254: v1(35.648,3.404) 35.657,3.394 35.657,1.793 CON1.A26@36.085,1.365 ; IC2.4@80.737,23.473 v1@80.737,24.527
  Inner 3 w0.254: v1(35.648,3.404) 40.547,8.303 40.547,8.959 40.868,9.28 41.538,9.28 50.736,18.479 50.749,18.479 55.738,23.467 65.538,23.467 65.853,23.152 70.955,23.152 71.387,23.585 72.378,23.585 72.631,23.838 73.464,23.838 74.36,24.734 74.36,24.749 74.936,25.324 79.932,25.324 v1(80.756,24.5)
Vcd17: CON1.A28 IC2.6 | length 54.6
  Top_Power w0.254: v1(38.31,3.181) 38.31,1.68 CON1.A28@38.648,1.342 ; IC2.6@79.112,23.447 v1@79.112,24.502
  Inner 3 w0.254: 38.1,3.404 38.1,5.3 41.097,8.297 41.275,8.297 56.077,23.099 65.385,23.099 65.7,22.784 71.107,22.784 71.425,23.101 72.416,23.101 72.784,23.47 73.617,23.47 74.729,24.582 74.729,24.596 75.088,24.956 78.675,24.956 v1(79.13,24.5)
Vcd18: CON1.A30 IC2.9 | length 52.7
  Top_Power w0.254: v1(40.766,4.324) 40.766,1.764 CON1.A30@41.188,1.342 ; v1(76.516,24.464) 76.516,24.413 76.728,24.202 76.728,23.603 IC2.9@76.622,23.498
  Inner 3 w0.254: v1(40.766,4.324) 40.718,4.371 40.313,4.371 40.271,4.413 38.985,4.413 38.837,4.562 38.837,4.995 41.402,7.561 41.58,7.561 51.355,17.335 59.871,17.335 63.5,20.964 65.472,20.964 65.755,20.681 67.899,20.681 69.202,21.984 71.349,21.984 71.73,22.365 72.721,22.365 73.089,22.733 74.086,22.733 74.924,23.571 75.623,23.571 v1(76.516,24.464)
Vcd19: CON1.A31 IC2.11 | length 53.1
  Top_Power w0.254: v1(42.096,3.701) 42.096,3.634 42.342,3.389 42.342,1.407 CON1.A31@42.382,1.368 ; IC2.11@75.149,23.498 75.189,23.538 75.189,24.295 75.248,24.354 v1(75.248,24.42)
  Inner 3 w0.254: v1(42.096,3.701) 42.03,3.701 41.67,4.06 41.197,4.06 40.969,3.833 40.331,3.833 40.118,4.045 38.729,4.045 38.468,4.305 38.468,5.148 41.249,7.929 41.428,7.929 51.203,17.704 59.547,17.704 64.195,22.352 71.197,22.352 71.578,22.733 72.568,22.733 72.936,23.101 73.929,23.101 v1(75.248,24.42)
Vcd20: CON1.A22 IC2.14 | length 54.2
  Top_Power w0.254: v1(30.683,3.146) 30.683,1.611 CON1.A22@31.002,1.291 ; v1@71.882,24.46 72.72,23.622 IC2.14@72.72,23.591
  Inner 3 w0.254: v1(30.683,3.146) 30.73,3.193 30.73,3.726 31.092,4.088 31.85,4.088 35.613,7.851 35.613,8.609 36.707,9.703 41.415,9.703 50.787,19.075 50.825,19.075 55.586,23.836 65.69,23.836 66.005,23.52 70.802,23.52 71.235,23.953 71.375,23.953 v1@71.882,24.46
  other v1: 71.882,24.5
Vcd21: CON1.A19 IC2.16 | length 56.4
  Top_Power w0.254: v1(26.792,3.272) 26.792,1.742 CON1.A19@27.192,1.342 ; v1@70.333,24.333 70.482,24.184 70.546,24.184 71.132,23.597 IC2.16@71.132,23.317
  Inner 3 w0.254: v1(26.792,3.272) 26.792,3.338 27.139,3.685 27.139,3.699 27.288,3.848 27.813,3.848 30.595,6.629 30.595,7.29 33.376,10.071 41.262,10.071 55.395,24.204 65.843,24.204 66.158,23.889 69.885,23.889 70.329,24.333 v1@70.333,24.333
  other v1: 70.333,24.5
Vcd22: CON1.A17 IC2.19 | length 56.7
  Top_Power w0.254: v1(24.274,3) 24.274,1.695 CON1.A17@24.678,1.291 ; v1@67.788,24.46 67.895,24.46 67.942,24.413 68.144,24.413 68.601,23.956 68.601,23.878 68.676,23.804 IC2.19@68.676,23.476
  Inner 3 w0.254: v1(24.274,3) 24.294,3.02 24.294,3.364 25.146,4.216 27.661,4.216 30.226,6.782 30.226,7.443 33.223,10.439 41.097,10.439 55.23,24.572 65.995,24.572 66.31,24.257 67.155,24.257 67.311,24.413 67.741,24.413 v1@67.788,24.46
  other v1: 67.788,24.5
Vcd23: CON1.A15 IC2.21 | length 59
  Top_Power w0.254: v1(21.566,3.016) 21.566,2.949 21.687,2.828 21.687,1.768 CON1.A15@22.087,1.368 ; v1(66.345,24.917) 66.392,24.87 66.392,24.613 66.748,24.257 66.806,24.257 67.076,23.987 67.076,23.374 IC2.21@67.132,23.317
  Inner 3 w0.254: v1(21.566,3.016) 21.566,5.192 25.997,9.623 28.419,9.623 31.158,12.362 41.994,12.362 42.012,12.344 42.481,12.344 55.077,24.94 66.322,24.94 v1(66.345,24.917)
Vcd24: CON1.A51 IC2.44 | length 12.3
  Top_Power w0.254: IC2.44@67.132,9.977 67.144,9.966 67.144,9.056 v1(67.156,9.044) ; CON1.A51@72.938,1.342 72.974,1.379 v1(72.974,3.226)
  Inner 2 w0.254: v1(67.156,9.044) 67.156,7.571 68.936,5.791 70.964,5.791 72.957,3.798 72.957,3.243 v1(72.974,3.226)
Vcd25: CON1.A52 IC2.46 | length 10.9
  Top_Power w0.254: IC2.46@68.732,9.977 68.78,9.93 68.78,8.852 v1(68.827,8.805) ; CON1.A52@74.177,1.424 74.27,1.517 v1(74.27,2.997)
  Inner 1 w0.254: v1(68.827,8.805) 73.342,4.289 74.223,3.409 74.223,3.044 v1(74.27,2.997)
Vcd26: CON1.A53 IC2.49 | length 10.3
  Top_Power w0.254: IC2.49@71.132,9.977 71.173,9.937 71.173,9.109 v1(71.214,9.068) ; v1(75.286,3.099) 75.286,1.458 CON1.A53@75.347,1.397
  Inner 1 w0.254: v1(71.214,9.068) 75.286,4.996 v1(75.286,3.099)
Vcd27: CON1.A55 IC2.51 | length 10.9
  Top_Power w0.254: IC2.51@72.732,9.977 72.732,8.622 72.813,8.541 v1(72.813,8.475) ; v1@77.648,2.972 77.648,1.636 CON1.A55@77.967,1.317
  Inner 1 w0.254: v1(72.813,8.475) 74.325,6.963 74.458,6.963 77.63,3.791 77.63,3.018 v1(77.648,3)
Vcd28: CON1.A63 IC2.54 | length 19.1
  Top_Power w0.254: IC2.54@75.132,9.977 75.189,9.921 75.189,9.266 75.327,9.128 75.327,9.056 v1(75.374,9.009) ; v1(87.554,3.658) 87.554,3.591 87.74,3.405 87.74,1.678 CON1.A63@88.127,1.291
  Inner 4 w0.254: v1(75.374,9.009) 75.954,9.588 82.626,9.588 87.554,4.661 v1(87.554,3.658)
Vcd29: CON1.A62 IC2.56 | length 19.2
  Top_Power w0.254: IC2.56@76.732,9.977 76.762,10.007 76.762,11.014 v1(76.792,11.044) ; CON1.A62@86.908,1.342 87.249,1.683 v1@87.249,3.023
  Inner 4 w0.254: v1(76.792,11.044) 76.839,10.997 76.839,10.684 77.566,9.957 82.779,9.957 88.045,4.69 88.045,3.454 87.661,3.07 87.296,3.07 v1@87.249,3.023
  other v1: 87.249,3
Vcd30: CON1.B61 IC2.59 | length 12
  Top_Power w0.254: IC2.59@79.132,9.977 79.132,8.997 79.401,8.728 v1(79.401,8.661)
  Inner 2 w0.254: v1(79.401,8.661) 79.886,8.176 79.987,8.176 81.088,7.076 82.253,7.076 85.356,3.973 85.356,3.012 v1@85.314,2.971
  Bottom_Ground w0.254: v1@85.314,2.971 85.314,1.655 CON1.B61@85.563,1.406
  other v1: 85.314,3
Vcd31: CON1.A61 IC2.61 | length 11.6
  Top_Power w0.254: IC2.61@80.732,9.977 80.732,8.633 80.748,8.617 80.748,8.214 81.056,7.907 v1(81.056,7.84) ; CON1.A61@85.612,1.368 85.945,1.7 v1@85.945,3.023
  Inner 2 w0.254: v1(81.056,7.84) 81.122,7.84 81.518,7.444 82.579,7.444 85.945,4.079 v1@85.945,3.023
  other v1: 85.945,3
Vras*: CON1.B44 IC1.26 IC2.26 IC3.26 IC4.26 | length 82.4
  Top_Power w0.254: v1(20.65,21.793) 20.697,21.84 20.697,22.191 20.818,22.311 IC1.26@20.818,23.3 ; IC2.26@63.144,23.349 63.142,23.347 63.142,21.983 63.703,21.421 v1(63.703,20.472)
  Inner 1 w0.254: v1(20.65,21.793) 20.65,12.548 v1(20.676,12.522) ; v1(63.703,20.472) 63.703,9.488 63.018,8.803 62.952,8.803 62.952,6.517 64.084,5.385 v1(64.084,4.826)
  Inner 4 w0.254: v1(20.65,21.793) 20.717,21.793 20.971,21.539 22.479,21.539 24.74,19.279 62.509,19.279 v1(63.703,20.472)
  Bottom_Ground w0.254: IC3.26@20.472,10.033 20.472,10.397 20.704,10.628 20.704,11.113 20.701,11.115 20.701,11.164 20.714,11.177 20.714,12.484 v1(20.676,12.522) ; IC4.26@62.687,10.008 62.687,9.58 62.904,9.363 62.904,8.783 v1(62.952,8.736) ; CON1.B44@64.024,1.457 64.084,1.517 v1(64.084,4.826)
We0*: CON1.B47 IC1.25 IC2.25 | length 73.4
  Top_Power w0.254: IC1.25@21.606,23.371 21.621,23.386 21.621,24.765 v1@21.625,24.769 ; IC2.25@63.932,23.317 63.989,23.261 63.989,22.478 64.138,22.329 64.437,22.329 64.991,21.775 64.991,21.302 65.279,21.014 66.595,21.014 66.753,21.172 v1(66.819,21.172)
  Inner 1 w0.254: v1(66.819,21.172) 67.14,20.851 67.14,10.965 67.683,10.422 67.683,4.402 v1(68.021,4.064)
  Inner 4 w0.254: v1@21.625,24.769 22.531,23.863 64.64,23.863 66.795,21.709 66.795,21.197 v1(66.819,21.172)
  Bottom_Ground w0.254: CON1.B47@67.758,1.482 68.123,1.847 68.123,3.306 68.021,3.408 v1(68.021,4.064)
  other v1: 21.625,24.75
We1*: CON1.B48 IC3.25 IC4.25 | length 70
  Inner 4 w0.254: v1(21.26,8.814) 21.26,7.455 24.765,3.95 24.765,3.119 26.21,1.674 46.963,1.674 47.473,2.184 50.444,2.184 50.965,1.664 65.641,1.664 66.293,2.316 66.425,2.447 66.425,3.412 66.311,3.527 66.311,5.19 63.585,7.916 63.585,8.569 v1(63.602,8.585)
  Inner 2 w0.254: v1(63.602,8.585) 63.668,8.585 63.805,8.722 64.36,8.722 69.267,3.815 v1(69.267,3.783)
  Bottom_Ground w0.254: v1(21.26,8.814) 21.274,8.828 21.274,9.623 IC3.25@21.285,9.634 ; IC4.25@63.5,9.957 63.558,9.899 63.558,8.629 v1(63.602,8.585) ; CON1.B48@69.104,1.482 69.412,1.79 69.412,3.571 69.267,3.717 v1(69.267,3.783)
pads on no net: IC1.40 IC2.38 IC2.40 IC3.38 IC3.40 IC4.38 IC4.40

## Polygon pours and split planes (outlines as drawn)
VCC on Top_Power "NONET_L-01_P-001" (solid, remove dead copper, pour order 0): 9.162,0.737 88.773,0.487 88.773,5.45 9.162,5.45
RAM_VCC on Top_Power "NONET_L-01_P-001" (solid, remove dead copper, pour order 4): -2.032,27.94 100.838,27.94 100.838,0 -2.032,0
GND on Inner 1 "NONET_L-01_P-001" (solid, remove dead copper, pour order 2): -2.032,27.94 100.838,27.94 100.838,0 -2.032,0
GND on Inner 4 "NONET_L-01_P-001" (solid, remove dead copper, pour order 3): -2.032,27.94 100.838,27.94 100.838,0 -2.032,0
GND on Bottom_Ground "NONET_L-01_P-001" (solid, remove dead copper, pour order 1): -2.032,27.94 100.838,27.94 100.838,0 -2.032,0
GND on Inner 2 "GND_L03_P005" (solid, remove dead copper, pour order 5): -2.083,28.092 -1.981,27.991 100.787,27.991 100.787,0.356 100.838,0.305 100.584,0.051 -2.032,0.051
GND on Inner 3 "GND_L04_P006" (solid, remove dead copper, pour order 6): -2.235,27.991 100.787,27.991 100.94,27.838 100.94,0.152 -1.88,0.152 -2.032,0.305

## Keep-outs
Keep-Out Layer:
  the board outline again, w0.254

## Silkscreen, mask and mechanical layers (free items; w line width, h text height)
Top Overlay:
  text "2MB VRAM" at 48.057,9.296 h1.25 r90
  text "(C) IanJ, '25" at 50.51,7.468 h1.25 r90